# EAGLE board uno (EAGLE 6.1)
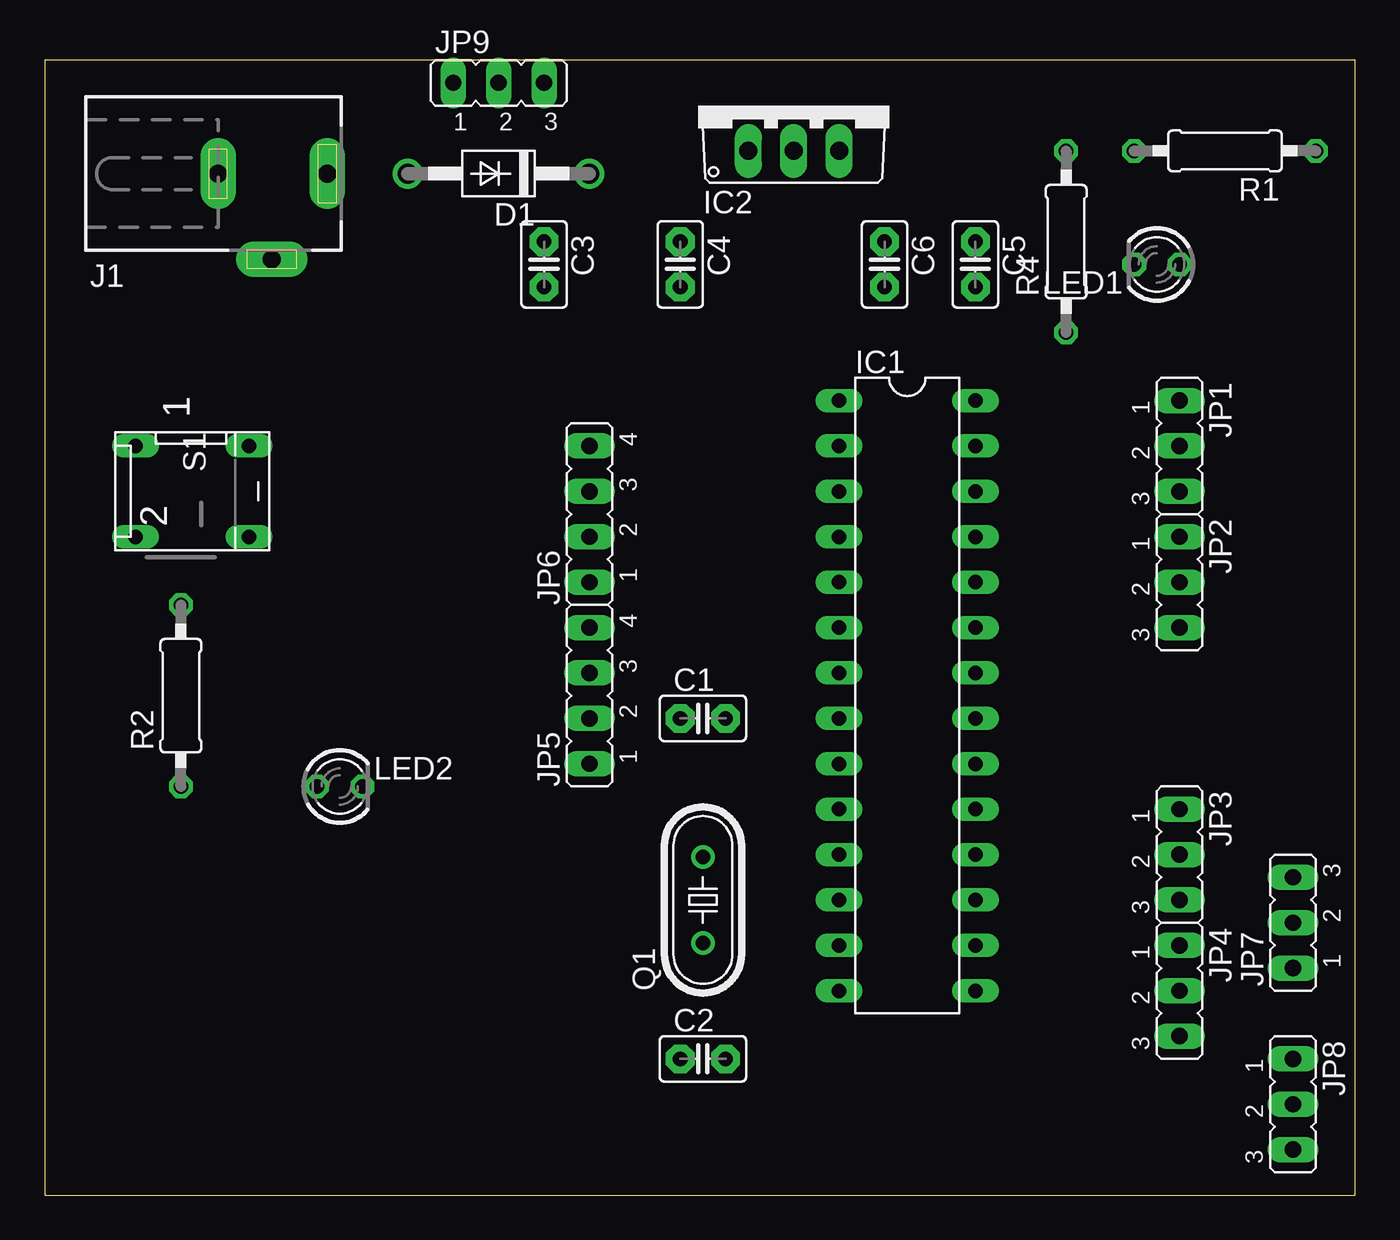
[diagram p0: board, top side]
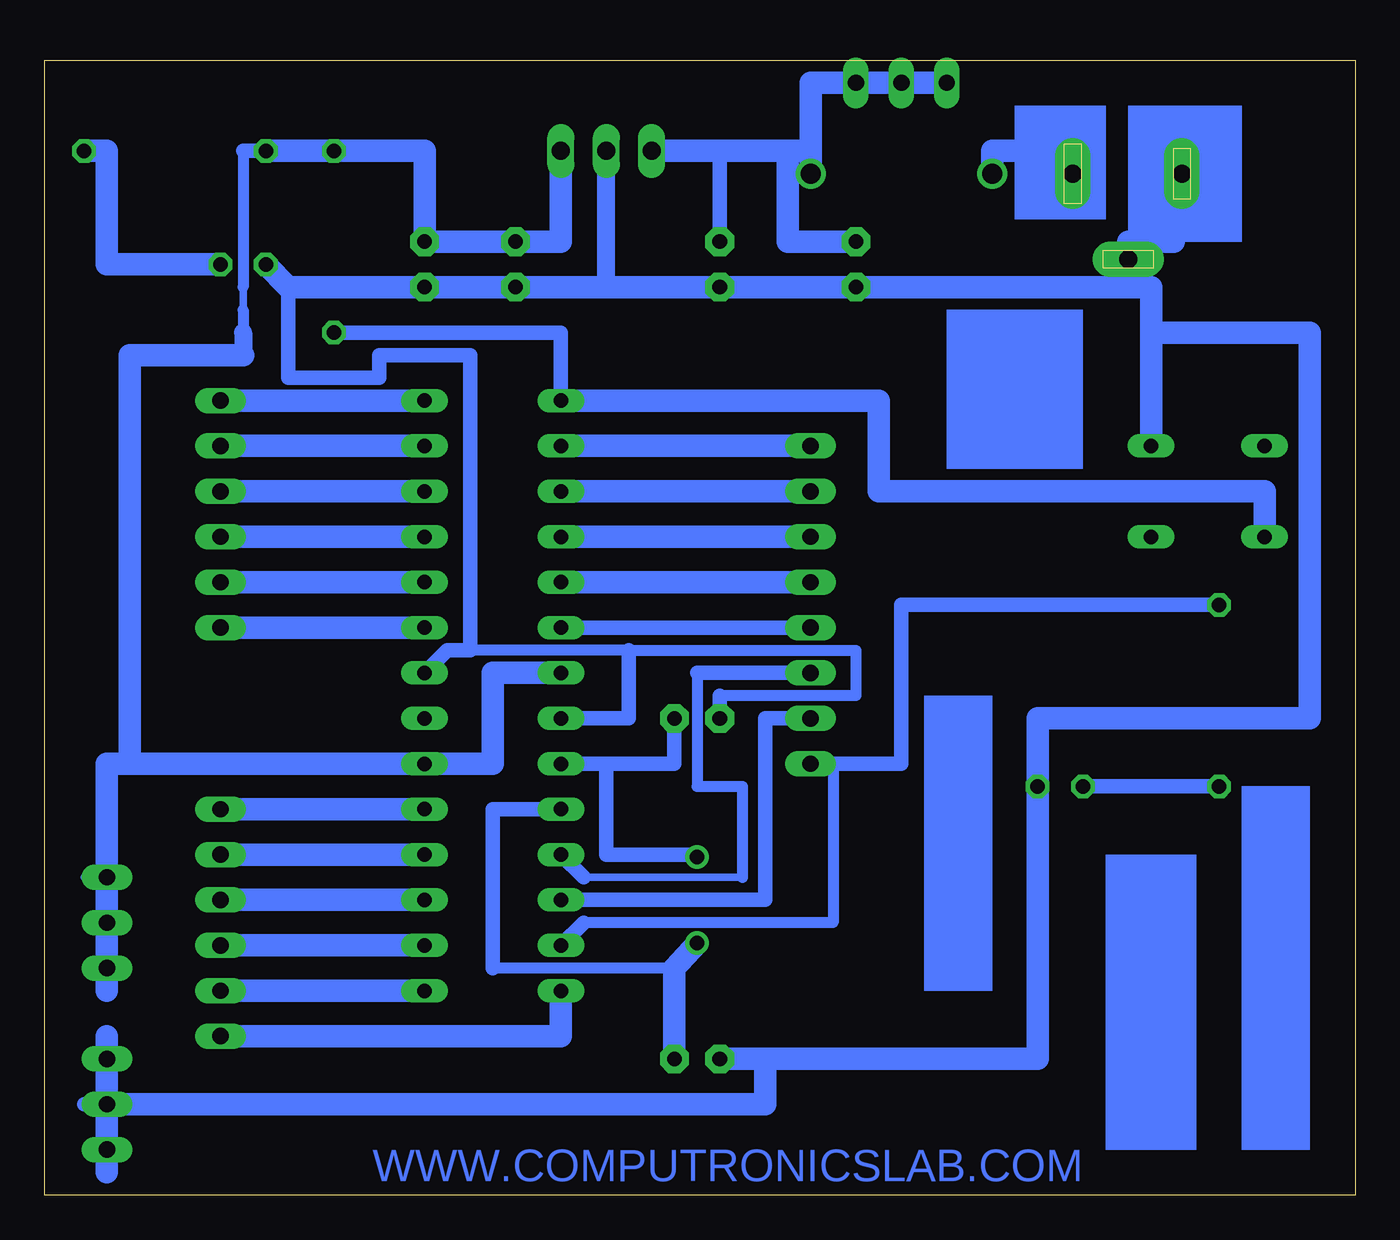
[diagram p1: board, bottom side, seen from below]

Size 73.33 x 63.49 mm. Coordinates in mm from the lower left corner, seen from the top.
Outline: 0,0 73.33,0 73.33,63.49 0,63.49 0,0
Copper layers (1*16): Top 0.035mm / dielectric 1.5mm / Bottom 0.035mm
Design rules: minimum track width 10mil, minimum drill 24mil, track to track 8mil, track to pad 8mil, pad to pad 8mil, via to via 8mil, smd to smd 8mil, copper to edge 40mil, drill to drill 8mil, minimum pad ring 10mil, minimum via ring 8mil, stop-mask expansion 4mil, vias tented up to drill 0mil, thermal gap 10mil

## Footprints (pad centres in the part's own frame; a part is rotated, then mirrored left to right if it is on the bottom)
C2.5-2 = drill 0.813 pad 1.6 octagon: 1 -1.27,0; 2 1.27,0
DO41-10 = drill 1.118: A 5.08,0; C -5.08,0
DIL28-3 = drill 0.813 long: 1 -16.51,-3.81; 2 -13.97,-3.81; 3 -11.43,-3.81; 4 -8.89,-3.81; 5 -6.35,-3.81; 6 -3.81,-3.81; 7 -1.27,-3.81; 8 1.27,-3.81; 9 3.81,-3.81; 10 6.35,-3.81; 11 8.89,-3.81; 12 11.43,-3.81; 13 13.97,-3.81; 14 16.51,-3.81; 15 16.51,3.81; 16 13.97,3.81; 17 11.43,3.81; 18 8.89,3.81; 19 6.35,3.81; 20 3.81,3.81; 21 1.27,3.81; 22 -1.27,3.81; 23 -3.81,3.81; 24 -6.35,3.81; 25 -8.89,3.81; 26 -11.43,3.81; 27 -13.97,3.81; 28 -16.51,3.81
TO220V = drill 1.016 long: 1 -2.54,-2.54; 2 0,-2.54; 3 2.54,-2.54
DCJ0303 = drill 1 pad 2 long: 1 0,3.1; 2 4.8,0; 3 0,-3
JP2 = drill 0.914 long: 1 -2.54,0; 2 0,0; 3 2.54,0
JP4 = drill 0.914 long: 1 -3.81,0; 2 -1.27,0; 3 1.27,0; 4 3.81,0
LED3MM = drill 0.813 octagon: A -1.27,0; K 1.27,0
HC49/S = drill 0.813: 1 -2.413,0; 2 2.413,0
0207/10 = drill 0.813 octagon: 1 -5.08,0; 2 5.08,0
DP-02 = drill 0.813 long: 1 -2.54,-2.54; 2 2.54,-2.54; 3 2.54,3.81; 4 -2.54,3.81

## Placement (x,y rotation side)
C1  22pf  [C2.5-2]  36.83,26.67 0 top
C2  22pf  [C2.5-2]  36.83,7.62 0 top
C3  100UF  [C2.5-2]  27.94,52.07 270 top
C4  0.1uf  [C2.5-2]  35.56,52.07 270 top
C5  0.1uf  [C2.5-2]  52.07,52.07 270 top
C6  4.7uf  [C2.5-2]  46.99,52.07 270 top
D1  1N4007  [DO41-10]  25.4,57.15 180 top
IC1  ATMEGA328  [DIL28-3]  48.26,27.94 270 top
IC2  7805  [TO220V]  41.91,60.96 0 top
J1  [DCJ0303]  12.7,57.15 270 top
JP1  [JP2]  63.5,41.91 270 top
JP2  [JP2]  63.5,34.29 270 top
JP3  [JP2]  63.5,19.05 270 top
JP4  [JP2]  63.5,11.43 270 top
JP5  [JP4]  30.48,27.94 90 top
JP6  [JP4]  30.48,38.1 90 top
JP7  [JP2]  69.85,15.24 90 top
JP8  [JP2]  69.85,5.08 270 top
JP9  [JP2]  25.4,62.23 0 top
LED1  [LED3MM]  62.23,52.07 180 top
LED2  [LED3MM]  16.51,22.86 0 top
Q1  16MHZ  [HC49/S]  36.83,16.51 90 top
R1  220R  [0207/10]  66.04,58.42 180 top
R2  330R  [0207/10]  7.62,27.94 90 top
R4  10K  [0207/10]  57.15,53.34 90 top
S1  [DP-02]  7.62,39.37 270 top

## Library data of the parts
C1-C6 = capacitor-wima
D1 = diode
IC1 = quantum-research-group; OC_FARNELL: unknown; OC_NEWARK: unknown
IC2 = linear
J1 = con-jack; OC_FARNELL: unknown; OC_NEWARK: unknown
JP1-JP9 = jumper
LED1 LED2 = led
Q1 = crystal; OC_FARNELL: 1667008; OC_NEWARK: unknown
R1 R2 R4 = rcl
S1 = switch-dil; MPN: MCDP02; OC_FARNELL: 1255233; OC_NEWARK: 26M1095

## Nets
N$1: C1.2 IC1.9 Q1.2
N$2: C2.2 IC1.10 Q1.1
N$3: D1.A J1.1
N$4: C5.1 C6.1 IC1.7 IC1.20 IC2.3 JP7.1 JP7.2 JP7.3 R1.2 R4.2
N$5: C1.1 C2.1 C3.2 C4.2 C5.2 C6.2 IC1.8 IC1.22 IC2.2 J1.2 J1.3 JP8.1 JP8.2 JP8.3 LED1.K LED2.K S1.4
N$6: LED1.A R1.1
N$7: C3.1 C4.1 D1.C IC2.1 JP9.1 JP9.2 JP9.3
N$8: IC1.28 JP1.1
N$9: IC1.27 JP1.2
N$10: IC1.26 JP1.3
N$11: IC1.25 JP2.1
N$12: IC1.24 JP2.2
N$13: IC1.23 JP2.3
N$14: IC1.5 JP6.1
N$15: IC1.2 JP6.4
N$16: IC1.3 JP6.3
N$17: IC1.4 JP6.2
N$18: IC1.6 JP5.4
N$19: IC1.12 JP5.2
N$20: IC1.11 JP5.3
N$21: IC1.13 JP5.1 R2.2
N$22: IC1.14 JP4.3
N$23: IC1.15 JP4.2
N$24: IC1.16 JP4.1
N$25: IC1.17 JP3.3
N$26: IC1.18 JP3.2
N$27: IC1.19 JP3.1
N$31: IC1.1 R4.1 S1.2
N$32: LED2.A R2.1

## Tracks (layer width: path | path; a pad name or v marks a point on that pad's centre or on a via)
N$1
  Bottom 0.254: 36.83,19.05 Q1.2
  Bottom 0.813: 41.91,24.13 41.91,19.05 36.83,19.05 | IC1.9 41.91,24.13 | C1.2 38.1,24.13 41.91,24.13
N$2
  Bottom 0.61: 38.1,12.7 48.26,12.7
  Bottom 0.813: IC1.10 48.26,21.59 48.26,12.7
  Bottom 1.27: C2.2 38.1,12.7 Q1.1
N$3
  Bottom 1.27: D1.A 20.32,58.42 16.51,58.42 J1.1
N$4
  Bottom 0.406: 71.12,17.78 JP7.3 | 62.23,50.8 62.23,49.53
  Bottom 0.61: 62.23,58.42 62.23,50.8 | 62.23,49.53 62.23,48.26
  Bottom 0.813: R1.2 62.23,58.42
  Bottom 1.016: 62.23,48.26 62.23,46.99 | JP7.2 JP7.1 69.85,11.43
  Bottom 1.27: IC1.7 48.26,29.21 48.26,24.13 IC1.20 68.58,24.13 | R1.2 R4.2 52.07,58.42 C5.1 C6.1 44.45,53.34 IC2.3 | 62.23,46.99 68.58,46.99 68.58,24.13 | 68.58,24.13 69.85,24.13 JP7.3 JP7.2 69.85,11.43
N$5
  Bottom 0.254: 10.16,57.15 J1.3
  Bottom 0.406: JP8.3 JP8.2 JP8.1
  Bottom 0.61: 35.56,27.94 27.94,27.94 27.94,30.48 40.64,30.48 49.53,30.48
  Bottom 0.813: IC1.22 50.8,30.48 49.53,30.48 49.53,46.99 54.61,46.99 54.61,45.72 59.69,45.72 59.69,50.8 | 35.56,27.94 C1.1 | JP8.2 71.12,5.08 | IC1.8 40.64,26.67 40.64,30.48
  Bottom 1.016: 41.91,50.8 IC2.2
  Bottom 1.27: C2.1 33.02,7.62 | 33.02,7.62 17.78,7.62 LED2.K 17.78,26.67 2.54,26.67 2.54,48.26 11.43,48.26 | 11.43,48.26 11.43,50.8 12.7,50.8 | 11.43,48.26 S1.4 | 10.16,57.15 10.16,53.34 12.7,53.34 J1.2 12.7,50.8 | LED1.K 59.69,50.8 C5.2 C6.2 41.91,50.8 C4.2 C3.2 12.7,50.8 | 33.02,7.62 33.02,5.08 JP8.2
N$6
  Bottom 1.27: LED1.A 69.85,52.07 69.85,58.42 R1.1
N$7
  Bottom 0.254: 33.02,58.42 31.75,58.42
  Bottom 0.813: 35.56,58.42 C4.1
  Bottom 1.27: D1.C 30.48,58.42 | 30.48,58.42 31.75,58.42 | 31.75,58.42 33.02,58.42 35.56,58.42 IC2.1 | 31.75,58.42 31.75,55.88 31.75,53.34 C3.1 | JP9.1 JP9.2 JP9.3 30.48,62.23 30.48,58.42 | 31.75,58.42 30.48,58.42
N$8
  Bottom 1.27: JP1.1 IC1.28
N$9
  Bottom 1.27: JP1.2 IC1.27
N$10
  Bottom 1.27: JP1.3 IC1.26
N$11
  Bottom 1.27: JP2.1 IC1.25
N$12
  Bottom 1.27: JP2.2 IC1.24
N$13
  Bottom 1.27: JP2.3 IC1.23
N$14
  Bottom 1.27: JP6.1 IC1.5
N$15
  Bottom 1.27: JP6.4 IC1.2
N$16
  Bottom 1.27: JP6.3 IC1.3
N$17
  Bottom 1.27: JP6.2 IC1.4
N$18
  Bottom 0.813: JP5.4 IC1.6
N$19
  Bottom 0.813: IC1.12 33.02,16.51 33.02,26.67 JP5.2
N$20
  Bottom 0.406: 34.29,17.78 43.18,17.78
  Bottom 0.61: 34.29,17.78 34.29,22.86 36.83,22.86 36.83,29.21
  Bottom 0.813: 43.18,17.78 IC1.11 | JP5.3 36.83,29.21
N$21
  Bottom 0.61: 43.18,15.24 29.21,15.24 29.21,24.13
  Bottom 0.813: R2.2 25.4,33.02 25.4,24.13 29.21,24.13 JP5.1 | 43.18,15.24 IC1.13
N$22
  Bottom 1.27: IC1.14 44.45,8.89 JP4.3
N$23
  Bottom 1.27: JP4.2 IC1.15
N$24
  Bottom 1.27: JP4.1 IC1.16
N$25
  Bottom 1.27: JP3.3 IC1.17
N$26
  Bottom 1.27: JP3.2 IC1.18
N$27
  Bottom 1.27: JP3.1 IC1.19
N$28
  Bottom 1.27: 69.85,8.89 69.85,1.27
N$31
  Bottom 0.813: R4.1 44.45,48.26 IC1.1
  Bottom 1.27: S1.2 5.08,39.37 26.67,39.37 26.67,44.45 IC1.1
N$32
  Bottom 0.813: LED2.A R2.1
(copper drawn outside any net)
  shapes: Bottom area x6

## Text on the board
Bottom: WWW.COMPUTRONICSLAB.COM